# Altium PCB Laser_Module_Adapter_PCB.PCBDOC
Units mm, origin at the board's own origin, x right, y up, seen from the top; angles counter-clockwise.
Board outline 17.15 x 78.74 mm, 2 copper layers (L1, L4), stack 0.97 mm thick; 2 components, 30 nets, 60 pads, 0 vias.
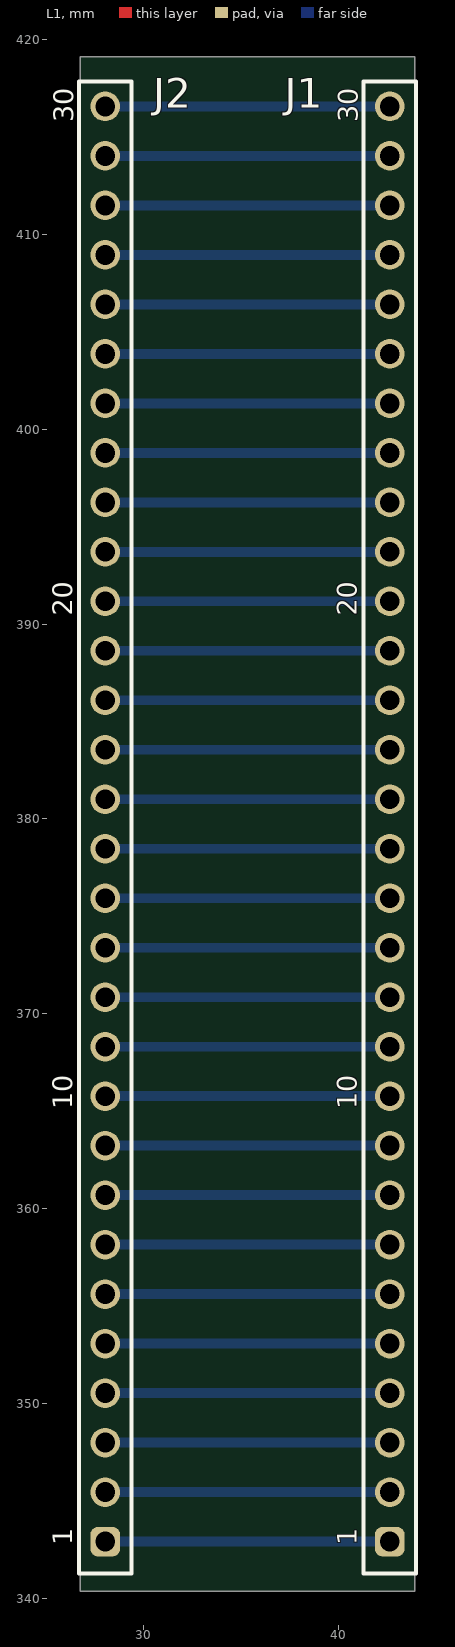
[diagram p0: L1 view]
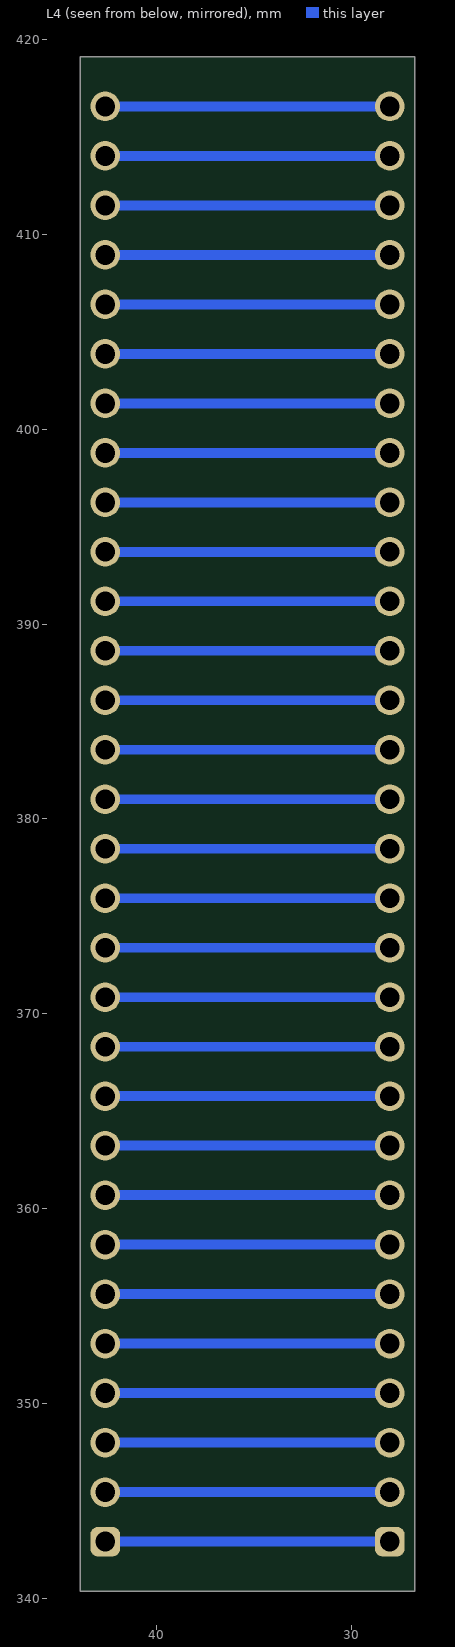
[diagram p1: L4 view, seen from below]

## Layer stack, top to bottom
Top Solder: solder mask 0.01, Solder Resist, Dk 3.5
L1: signal copper 0.035
Dielectric1: core 0.9, FR-4, Dk 4.8
L4: signal copper 0.035
Bottom Solder: solder mask 0.01, Solder Resist, Dk 3.5

## Board outline
26.748,340.366 26.748,419.106 43.893,419.106 43.893,340.366

## Design rules (kind name [scope] priority, off if disabled: settings)
BoardOutlineClearance [All] p1: gap=0.254 ignorepadtopadclearanceinfootprint=FALSE except(0: Arc-SplitContinuation Track-SplitContinuation SMDPad-SplitContinuation THPad-SplitContinuation Via-SplitContinuation Fill-SplitContinuation Poly-SplitContinuation Region-SplitContinuation Text-SplitContinuation)
Clearance [All] p1: gap=0.127 ignorepadtopadclearanceinfootprint=FALSE
ComponentClearance [All] p1: gap=0 collisioncheckmode=3 verticalgap=0.35 showdistances=FALSE
DiffPairsRouting [All] p1: maxlimit=0.127 minlimit=0.127 mostfreqgap=0.127 toplayer_minwidth=0.203 toplayer_maxwidth=0.203 toplayer_prefwidth=0.203 bottomlayer_minwidth=0.203 bottomlayer_maxwidth=0.203 bottomlayer_prefwidth=0.203 impedanceprofiledriven=TRUE impedanceprofileid={BF671BE6-7347-43D6-B7A3-1AD51EFE2DB2} impedanceprofilevalue=100.000000 maxuncoupledlength=12.7
FabricationTestPointUsage TestPointUsage [All] p1: valid=0 allowmultiple=FALSE
FabricationTestpoint Testpoint [All] p1: side=3 testpointundercomponent=TRUE minsize=1.016 maxsize=2.54 preferedsize=1.524 minholesize=0 maxholesize=1.016 preferedholesize=0.813 testpointgrid=0.025 allowsidetop=TRUE allowsidebottom=TRUE usegrid=TRUE gridtolerance=0
HoleSize [All] p1: absolutevalues=TRUE maxlimit=5 minlimit=0.2 maxpercent=80.000 minpercent=20.000
HoleToHoleClearance [All] p1: gap=0.2 allowstackedmicrovias=TRUE
MinimumSolderMaskSliver [All] p1: minsoldermaskwidth=0.1
PermittedLayers [All] p1 off: toplayerpermitted=TRUE bottomlayerpermitted=FALSE
PlaneClearance [All] p1: clearance=0.15
PlaneConnect [All] p1: pad.planeconnectstyle=Relief pad.reliefexpansion=0.508 pad.reliefentries=4 pad.reliefconductorwidth=0.381 pad.reliefairgap=0.381 via.planeconnectstyle=Direct via.reliefexpansion=0.508 via.reliefentries=4 via.reliefconductorwidth=0.381 via.reliefairgap=0.381
PolygonConnect "Vias Direct Connect" [IsVia] p1: connectstyle=Direct reliefconductorwidth=0.254 reliefentries=4 polygonreliefangle="90 Angle" airgapwidth=0.254
PolygonConnect [All] p2: connectstyle=Relief reliefconductorwidth=0.2 reliefentries=4 polygonreliefangle="90 Angle" airgapwidth=0.15
RoomDefinition Laser_Module_Adapter_PCB [InComponentClass('Laser_Module_Adapter_PCB')] p1 off: confinementstyle=ConfineIn formatcopy=TRUE lockcomponents=FALSE outline 192,252.25 155,252.25 155,213.5 192,213.5
RoutingVias RoutingVias_HP [InNetClass('HP')] p1: holewidth=0.711 width=1 viastyle="Through Hole" minholewidth=0.711 minwidth=1 maxholewidth=0.711 maxwidth=1
RoutingVias [All] p2: holewidth=0.2 width=0.5 viastyle="Through Hole" minholewidth=0.2 minwidth=0.5 maxholewidth=0.6 maxwidth=1
SilkToSilkClearance [All] p1: silktosilkclearance=0.025
SilkToSolderMaskClearance SilkscreenOverComponentPads [IsPad] p1: minsilkscreentomaskgap=0.025 clearancetoexposedcopper=TRUE
SolderMaskExpansion [All] p1: expansion=0 istentingtop=FALSE
Width Width_HP [InNetClass('HP')] p1: maxlimit=1.27 minlimit=0.508 preferedwidth=0.762
Width [All] p2: maxlimit=2.54 minlimit=0.152 preferedwidth=0.152
19 further rules are at their usual default settings.

## Components (designator, comment, footprint, x,y, rotation, side; value= is the part's Value field where it differs from the comment)
J1 "61303211821" 61303211821_30 42.623,382.276 r90 top
J2 "61303211821" 61303211821_30 28.018,382.276 r90 top

## Footprints (in the part's own frame and the unit in brackets; to place one, negate y for a bottom-side part, rotate by r counter-clockwise, add the part's x,y. Pads: shape width x height; smd on the part's side, far side on the other; paste and mask are expansions set on the pad)
61303211821_30 [mm] "Socket Header, Pitch 2.54 mm, THT, Vertical, single row, 32p"
  rrect50% 1.52x1.52 hole 1.02: 1(-39.37,0)
  round 1.52 hole 1.02: 2(-36.83,0) 3(-34.29,0) 4(-31.75,0) 5(-29.21,0) 6(-26.67,0) 7(-24.13,0) 8(-21.59,0) 9(-19.05,0) 10(-16.51,0) 11(-13.97,0) 12(-11.43,0) 13(-8.89,0) 14(-6.35,0) 15(-3.81,0) 16(-1.27,0) 17(1.27,0) 18(3.81,0) 19(6.35,0) 20(8.89,0) 21(11.43,0) 22(13.97,0) 23(16.51,0) 24(19.05,0) 25(21.59,0) 26(24.13,0) 27(26.67,0) 28(29.21,0) 29(31.75,0) 30(34.29,0)
  silkscreen extent -41.02,-1.35 35.56,1.35, body extent -40.89,-1.25 35.71,1.25, height 8.55

## Part data
J1 J2: library part CON_1x30_2.54_61303211821, "WR-PHD socket Header, THT, pitch 2.54mm, Single Row, Angled, 32p", Contact Resistance=20mOhm, Manufacturer="Wurth Elektronik", Operating Temperature="-40 to +105degC", Rated Current=3A, Withstanding Voltage=500VAC, Working Voltage=250VAC, ComponentLink1Description=Manufacturer, ComponentLink1URL=http://www.we-online.de, ComponentLink2Description=Datasheet, ComponentLink2URL=https://www.we-online.com/catalog/datasheet/61303211021.pdf, Gender="Pin Header", Manufacturer Part Number=61303211821, Mounting Technology=THT, Orientation=Angled, Packaging=Bag, Pin Number=32, Pitch=2.54mm, Row Number=Single

## Nets (pads, with @x,y where several pads share a name; then routed paths per layer and width w, separated by ;. In a path a pad name is that pad's centre, name@x,y a point inside that pad or via, vN(x,y) a via of type N, cw(c..) or ccw(c..) an arc to the next point about the centre after c; other vN are vias at no path point)
NetJ1_1: J1.1 J2.1 | length 14.6
  L4 w0.508: J2.1 J1.1
NetJ1_2: J1.2 J2.2 | length 14.6
  L4 w0.508: J2.2 J1.2
NetJ1_3: J1.3 J2.3 | length 14.6
  L4 w0.508: J2.3 J1.3
NetJ1_4: J1.4 J2.4 | length 14.6
  L4 w0.508: J2.4 J1.4
NetJ1_5: J1.5 J2.5 | length 14.6
  L4 w0.508: J2.5 J1.5
NetJ1_6: J1.6 J2.6 | length 14.6
  L4 w0.508: J2.6 J1.6
NetJ1_7: J1.7 J2.7 | length 14.6
  L4 w0.508: J2.7 J1.7
NetJ1_8: J1.8 J2.8 | length 14.6
  L4 w0.508: J2.8 J1.8
NetJ1_9: J1.9 J2.9 | length 14.6
  L4 w0.508: J2.9 J1.9
NetJ1_10: J1.10 J2.10 | length 14.6
  L4 w0.508: J2.10 J1.10
NetJ1_11: J1.11 J2.11 | length 14.6
  L4 w0.508: J2.11 J1.11
NetJ1_12: J1.12 J2.12 | length 14.6
  L4 w0.508: J2.12 J1.12
NetJ1_13: J1.13 J2.13 | length 14.6
  L4 w0.508: J2.13 J1.13
NetJ1_14: J1.14 J2.14 | length 14.6
  L4 w0.508: J2.14 J1.14
NetJ1_15: J1.15 J2.15 | length 14.6
  L4 w0.508: J2.15 J1.15
NetJ1_16: J1.16 J2.16 | length 14.6
  L4 w0.508: J2.16 J1.16
NetJ1_17: J1.17 J2.17 | length 14.6
  L4 w0.508: J2.17 J1.17
NetJ1_18: J1.18 J2.18 | length 14.6
  L4 w0.508: J2.18 J1.18
NetJ1_19: J1.19 J2.19 | length 14.6
  L4 w0.508: J2.19 J1.19
NetJ1_20: J1.20 J2.20 | length 14.6
  L4 w0.508: J2.20 J1.20
NetJ1_21: J1.21 J2.21 | length 14.6
  L4 w0.508: J2.21 J1.21
NetJ1_22: J1.22 J2.22 | length 14.6
  L4 w0.508: J2.22 J1.22
NetJ1_23: J1.23 J2.23 | length 14.6
  L4 w0.508: J2.23 J1.23
NetJ1_24: J1.24 J2.24 | length 14.6
  L4 w0.508: J2.24 J1.24
NetJ1_25: J1.25 J2.25 | length 14.6
  L4 w0.508: J2.25 J1.25
NetJ1_26: J1.26 J2.26 | length 14.6
  L4 w0.508: J2.26 J1.26
NetJ1_27: J1.27 J2.27 | length 14.6
  L4 w0.508: J2.27 J1.27
NetJ1_28: J1.28 J2.28 | length 14.6
  L4 w0.508: J2.28 J1.28
NetJ1_29: J1.29 J2.29 | length 14.6
  L4 w0.508: J2.29 J1.29
NetJ1_30: J1.30 J2.30 | length 14.6
  L4 w0.508: J2.30 J1.30

## Silkscreen, mask and mechanical layers (free items; w line width, h text height)
Mechanical 1:
  the board outline again, w0.1

## Text inside footprints (layer, text, board x,y; h text height)
J1: Top Overlay "30" at 40.972,415.753 h1.02 r90; Top Overlay "1" at 40.923,342.716 h1.02 r90; Top Overlay "10" at 40.923,365.086 h1.02 r90; Top Overlay "20" at 40.923,390.436 h1.02 r90
J2: Top Overlay "30" at 26.367,415.753 h1.02 r90; Top Overlay "1" at 26.318,342.716 h1.02 r90; Top Overlay "10" at 26.318,365.086 h1.02 r90; Top Overlay "20" at 26.318,390.436 h1.02 r90